# Altium PCB STE2007_Nokia 1202.PcbDoc
Units mm, origin at the board's own origin, x right, y up, seen from the top; angles counter-clockwise.
Board outline 37 x 38.5 mm, 2 copper layers (Top Layer, Bottom Layer); 4 components, 9 nets, 24 pads, 2 vias.
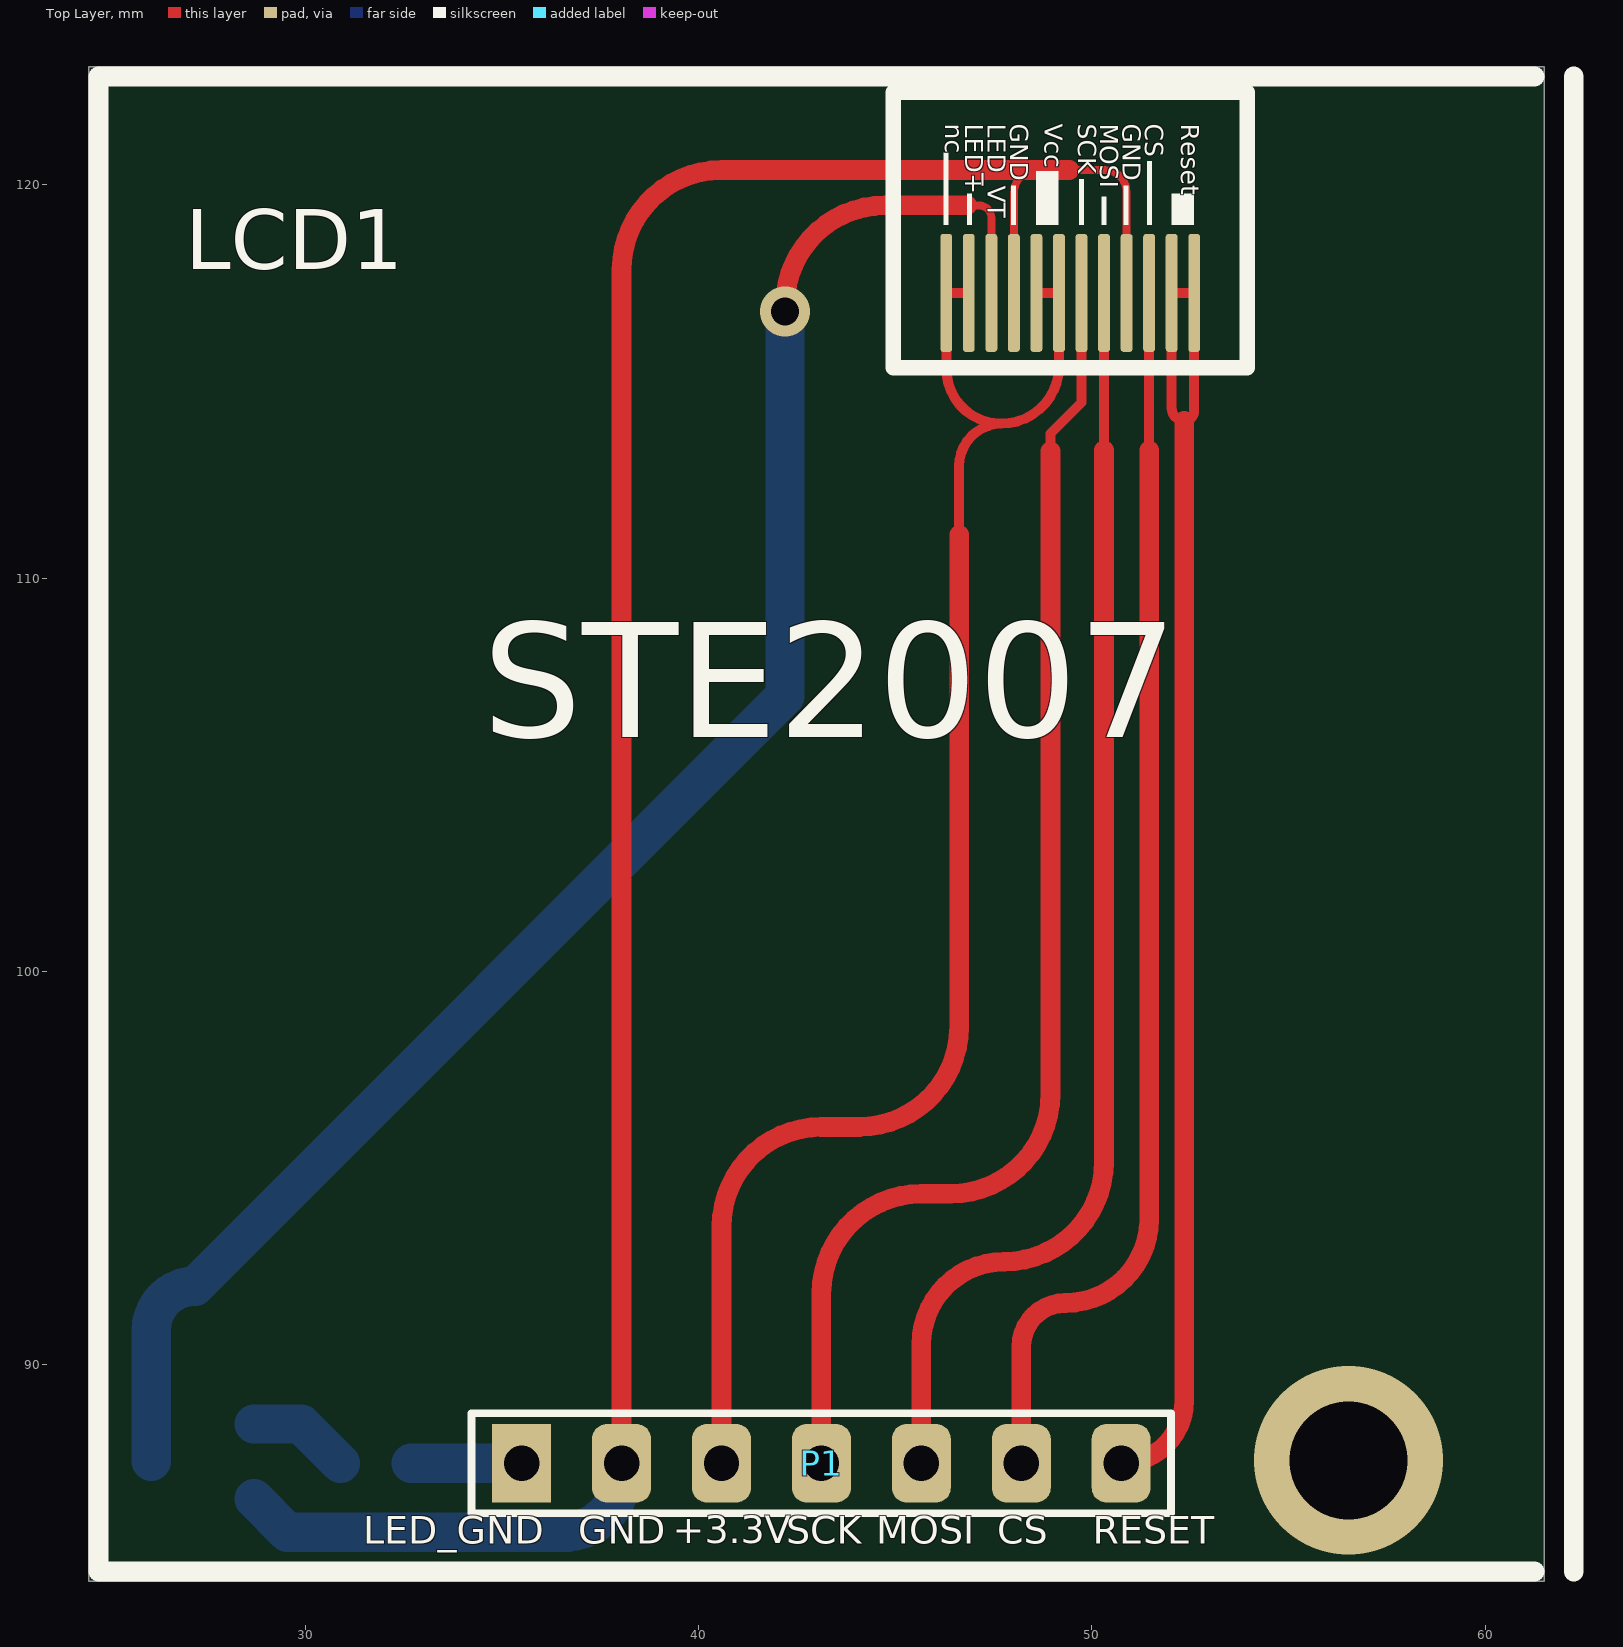
[diagram p0: Top Layer view]
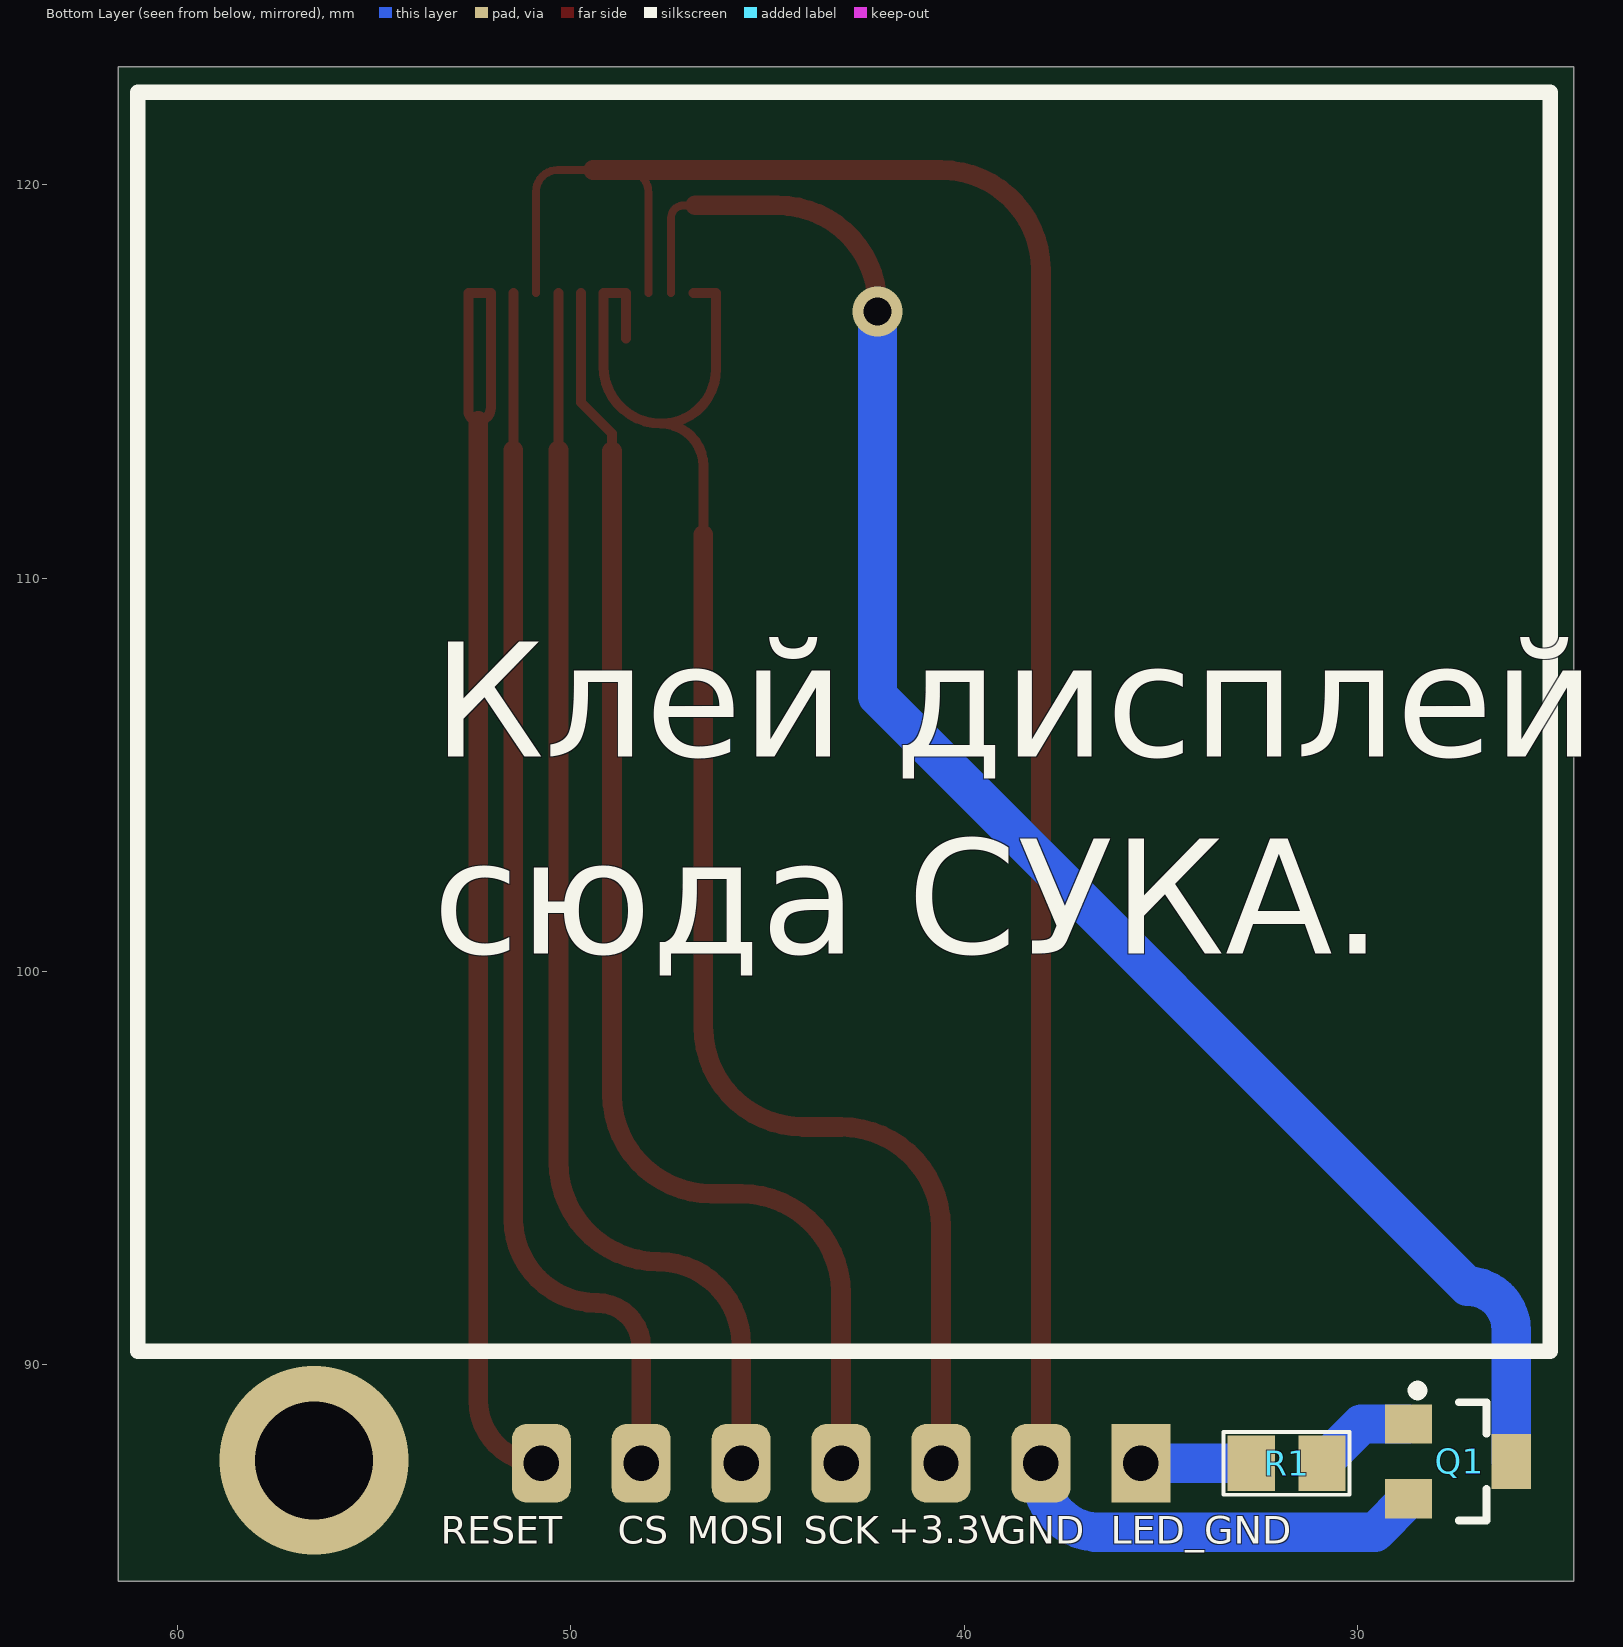
[diagram p1: Bottom Layer view, seen from below]

## Layer stack, top to bottom
Top Solder: solder mask 0.0102, Solder Resist, Dk 3.5
Top Layer: signal copper 0.0356
Dielectric 1: dielectric 0.32, FR-4, Dk 4.8
Bottom Layer: signal copper 0.0356
Bottom Solder: solder mask 0.0102, Solder Resist, Dk 3.5

## Board outline
24.5,84.5 24.5,123 61.5,123 61.5,84.5

## Design rules (kind name [scope] priority, off if disabled: settings)
Clearance [All] p1: gap=0.254 ignorepadtopadclearanceinfootprint=FALSE except(0: Arc-Hole Track-Hole SMDPad-Hole THPad-Hole Via-Hole Fill-Hole Poly-Hole Region-Hole Text-Hole)
PolygonConnect [All] p1: connectstyle=Relief reliefconductorwidth=0.254 reliefentries=4 polygonreliefangle="90 Angle" airgapwidth=0.254
RoutingVias [All] p1: holewidth=0.711 width=1.27 viastyle="Through Hole" minholewidth=0.711 minwidth=1.27 maxholewidth=0.711 maxwidth=1.27
SolderMaskExpansion [All] p1: expansion=0.102
Width [All] p1: maxlimit=2 minlimit=0.2 preferedwidth=0.2 minimp=50.000000 maximp=50.000000 favimp=50.000000
30 further rules are at their usual default settings.

## Components (designator, comment, footprint, x,y, rotation, side; value= is the part's Value field where it differs from the comment)
LCD1 "STE2007" "DISPLAY_NOKIA 1202" 49.45,115.35 r180 top
P1 "Header 7" HDR1X7 35.505,87.5 r0 top
Q1 "2SC2712" SOT23_N 27.423,87.55 r180 bottom
R1 "1k" 6-0805_N 31.8,87.5 r180 bottom

## Footprints (in the part's own frame and the unit in brackets; to place one, negate y for a bottom-side part, rotate by r counter-clockwise, add the part's x,y. Pads: shape width x height; smd on the part's side, far side on the other; paste and mask are expansions set on the pad)
6-0805_N [mm] "Chip Resistor, Body 2.0x1.2mm, IPC Medium Density"
  rect 1.2x1.4 smd: 1(-0.9,0) 2(0.9,0)
  silkscreen extent -1.6,-0.8 1.6,0.8, body extent -1.07,-0.7 1.07,0.7, height 0.7
"DISPLAY_NOKIA 1202" [mm]
  rrect50% 0.3x3 smd: 1(-3.15,-1.9) 2(-2.577,-1.9) 3(-2.005,-1.9) 4(-1.432,-1.9) 5(-0.859,-1.9) 6(-0.286,-1.9) 7(0.286,-1.9) 8(0.859,-1.9) 9(1.432,-1.9) 10(2.005,-1.9) 11(2.577,-1.9) 12(3.15,-1.9)
  silkscreen extent -4.5,-7 4.5,0
HDR1X7 [mm] "Connector; Header; 7 Position"
  rect 1.5x2 hole 0.9: 1(0,0)
  rrect50% 1.5x2 hole 0.9: 2(2.54,0) 3(5.08,0) 4(7.62,0) 5(10.16,0) 6(12.7,0) 7(15.24,0)
  silkscreen extent -1.27,-1.27 16.51,1.27
SOT23_N [mm]
  rect 1.2x1 smd: 1(-1.277,0.95) 2(-1.277,-0.95)
  rect 1x1.4 smd: 3(1.331,0)
  silkscreen extent -1.18,-1.5 0.7,1.92, body extent -0.7,-1.5 0.7,1.5, height 1.1

## Part data
LCD1: library part "Display_Nokia 1202"
P1: "Header, 7-Pin", LatestRevisionDate=17-Jul-2002, LatestRevisionNote="Re-released for DXP Platform.", Publisher="Altium Limited"
Q1: "NPN"

## Via types
v1: diameter 4.8, hole 3, Top Layer to Bottom Layer, 1 vias
v2: diameter 1.27, hole 0.711, Top Layer to Bottom Layer, 1 vias

## Nets (pads, with @x,y where several pads share a name; then routed paths per layer and width w, separated by ;. In a path a pad name is that pad's centre, name@x,y a point inside that pad or via, vN(x,y) a via of type N, cw(c..) or ccw(c..) an arc to the next point about the centre after c; other vN are vias at no path point)
GND: LCD1.4 LCD1.9 P1.2 Q1.2 | length 61.8
  Top Layer w0.2: LCD1.9 48.018,119.793 cw(c48.6,119.793) 48.6,120.375 ; 49.425,120.375 50.325,120.375 cw(c50.325,119.818) 50.882,119.818 LCD1.4
  Top Layer w0.5: P1.2 38.045,117.835 cw(c40.585,117.835) 40.585,120.375 48.6,120.375 49.425,120.375
  Bottom Layer w1: Q1.2 29.554,85.746 36.567,85.746 ccw(c36.567,87.224) 36.676,85.75 ccw(c36.567,87.224) 38.045,87.224 P1.2
NetLCD1_1: LCD1.1 LCD1.2 P1.7 | length 34.8
  Top Layer w0.254: 52.027,114.323 ccw(c52.35,114.323) 52.35,114 ccw(c52.35,114.25) 52.6,114.25 LCD1.1 LCD1.2 52.027,114.323
  Top Layer w0.5: P1.7 ccw(c50.745,89.105) 52.35,89.105 52.35,114
NetLCD1_3: LCD1.3 P1.6 | length 31.6
  Top Layer w0.254: 51.455,113.25 LCD1.3
  Top Layer w0.5: P1.6 48.205,90.455 cw(c49.325,90.455) 49.325,91.575 ccw(c49.325,93.705) 51.455,93.705 51.455,113.25
NetLCD1_5: LCD1.5 P1.5 | length 32.4
  Top Layer w0.254: 50.309,113.25 LCD1.5
  Top Layer w0.5: P1.5 45.665,90.521 cw(c47.769,90.521) 47.769,92.625 ccw(c47.769,95.165) 50.309,95.165 50.309,113.25
NetLCD1_6: LCD1.6 P1.4 | length 33.7
  Top Layer w0.254: 48.95,113.225 48.95,113.675 49.736,114.461 LCD1.6
  Top Layer w0.5: P1.4 43.125,91.81 cw(c45.665,91.81) 45.665,94.35 46.41,94.35 ccw(c46.41,96.89) 48.95,96.89 48.95,113.225
NetLCD1_7: LCD1.7 LCD1.8 LCD1.11 LCD1.12 P1.3 | length 41.5
  Top Layer w0.254: 46.625,111.1 46.625,112.85 cw(c47.7,112.85) 47.7,113.925 ; LCD1.11 LCD1.12 46.3,115.325 ccw(c47.7,115.325) 47.7,113.925 ; LCD1.8@48.591,116.091 LCD1.8 LCD1.7 49.164,115.389 cw(c47.7,115.389) 47.7,113.925
  Top Layer w0.5: P1.3 40.585,93.51 cw(c43.125,93.51) 43.125,96.05 44.085,96.05 ccw(c44.085,98.59) 46.625,98.59 46.625,111.1
NetLCD1_10: LCD1.10 Q1.3 | length 45
  Top Layer w0.2: 46.825,119.475 47.125,119.475 cw(c47.125,119.155) 47.445,119.155 LCD1.10
  Top Layer w0.5: v2(42.2,116.775) 42.2,116.935 cw(c44.74,116.935) 44.74,119.475 46.825,119.475
  Bottom Layer w1: Q1.3 26.092,90.892 cw(c27.2,90.892) 27.2,92 42.2,107 v2(42.2,116.775)
NetP1_1: P1.1 R1.1 | length 2.8
  Bottom Layer w1: R1.1 P1.1
NetQ1_1: Q1.1 R1.2 | length 2.6
  Bottom Layer w1: Q1.1 29.9,88.5 R1.2
copper on no net:
  other v1: 56.525,87.575

## Silkscreen, mask and mechanical layers (free items; w line width, h text height)
Top Overlay:
  lines w0.5: 61.25,84.75 24.75,84.75 24.75,122.75 61.25,122.75 ; 62.25,84.75 62.25,122.75
  text "+3.3V" at 39.35,85.235 h1.2
  text "LED_GND" at 31.475,85.225 h1.2
  text "GND" at 36.95,85.225 h1.2
  text "SCK" at 42.225,85.225 h1.2
  text "MOSI" at 44.525,85.225 h1.2
  text "CS" at 47.6,85.225 h1.2
  text "RESET" at 50.025,85.225 h1.2
Bottom Overlay:
  text "Клей дисплей  / сюда СУКА." at 53.5,99.5 h5
  text "+3.3V" at 41.925,85.235 h1.2
  text "LED_GND" at 36.275,85.225 h1.2
  text "GND" at 39.15,85.225 h1.2
  text "SCK" at 44.075,85.225 h1.2
  text "MOSI" at 47.05,85.225 h1.2
  text "CS" at 48.8,85.225 h1.2
  text "RESET" at 53.3,85.225 h1.2
Mechanical 15:
  rectangle: 44.75,120.75 54,124.25
  lines w0.2: 49,127 50.5,124.5 ; 50,133.5 50.5,124.5 ; 51.75,127.25 50.5,124.5 ; 65,119 62.5,117.5 ; 65.25,116.25 62.5,117.5 ; 71.5,118 62.5,117.5
  text "Косяк!!! / Проточи этот квадрат или сдвинь что-нибудь куда-нибудь." at 37.25,134 h3
  text "Косяк!!! / Увеличить плату до?сюда!" at 74,116 h3

## Text inside footprints (layer, text, board x,y; h text height)
LCD1: Top Overlay "nc" at 46.125,121.553 h0.8 r270; Top Overlay "GND" at 47.775,121.553 h0.8 r270; Top Overlay "LED_VT" at 47.204,121.553 h0.8 r270; Top Overlay "Vcc" at 48.65,121.554 h0.8 r270; Top Overlay "LED+" at 46.625,121.553 h0.8 r270; Top Overlay "SCK" at 49.5,121.553 h0.8 r270; Top Overlay "MOSI" at 50.067,121.553 h0.8 r270; Top Overlay "GND" at 50.633,121.553 h0.8 r270; Top Overlay "CS" at 51.2,121.553 h0.8 r270; Top Overlay "Reset" at 52.125,121.553 h0.8 r270